# EAGLE board PiedPiper_Camera_PCB_v51 (EAGLE 9.7.0)
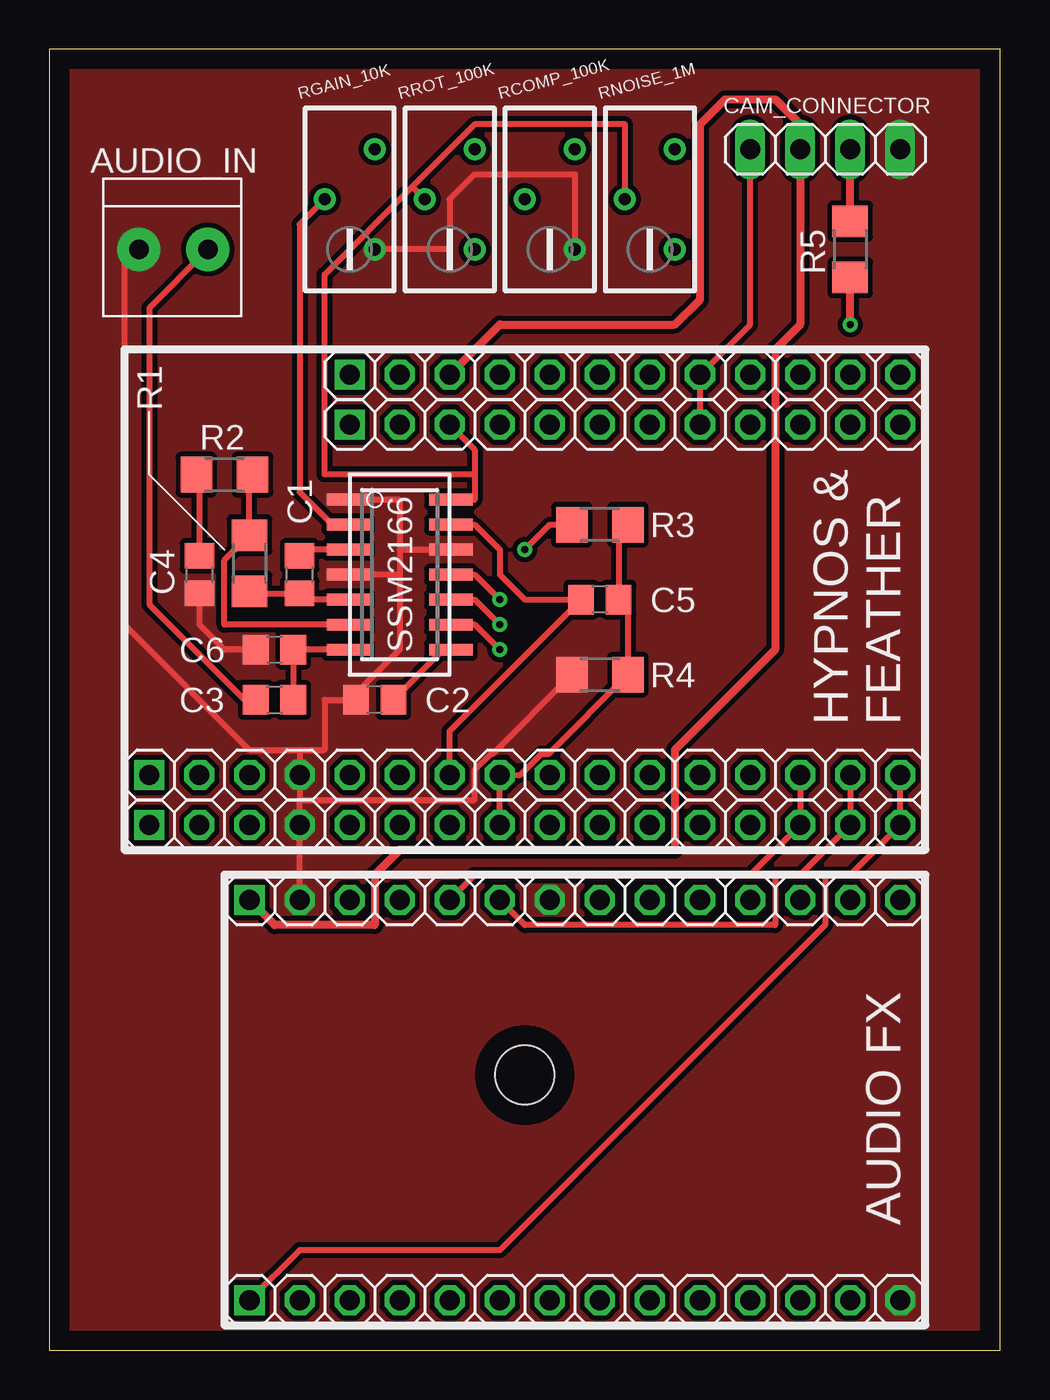
[diagram p0: board, top side]
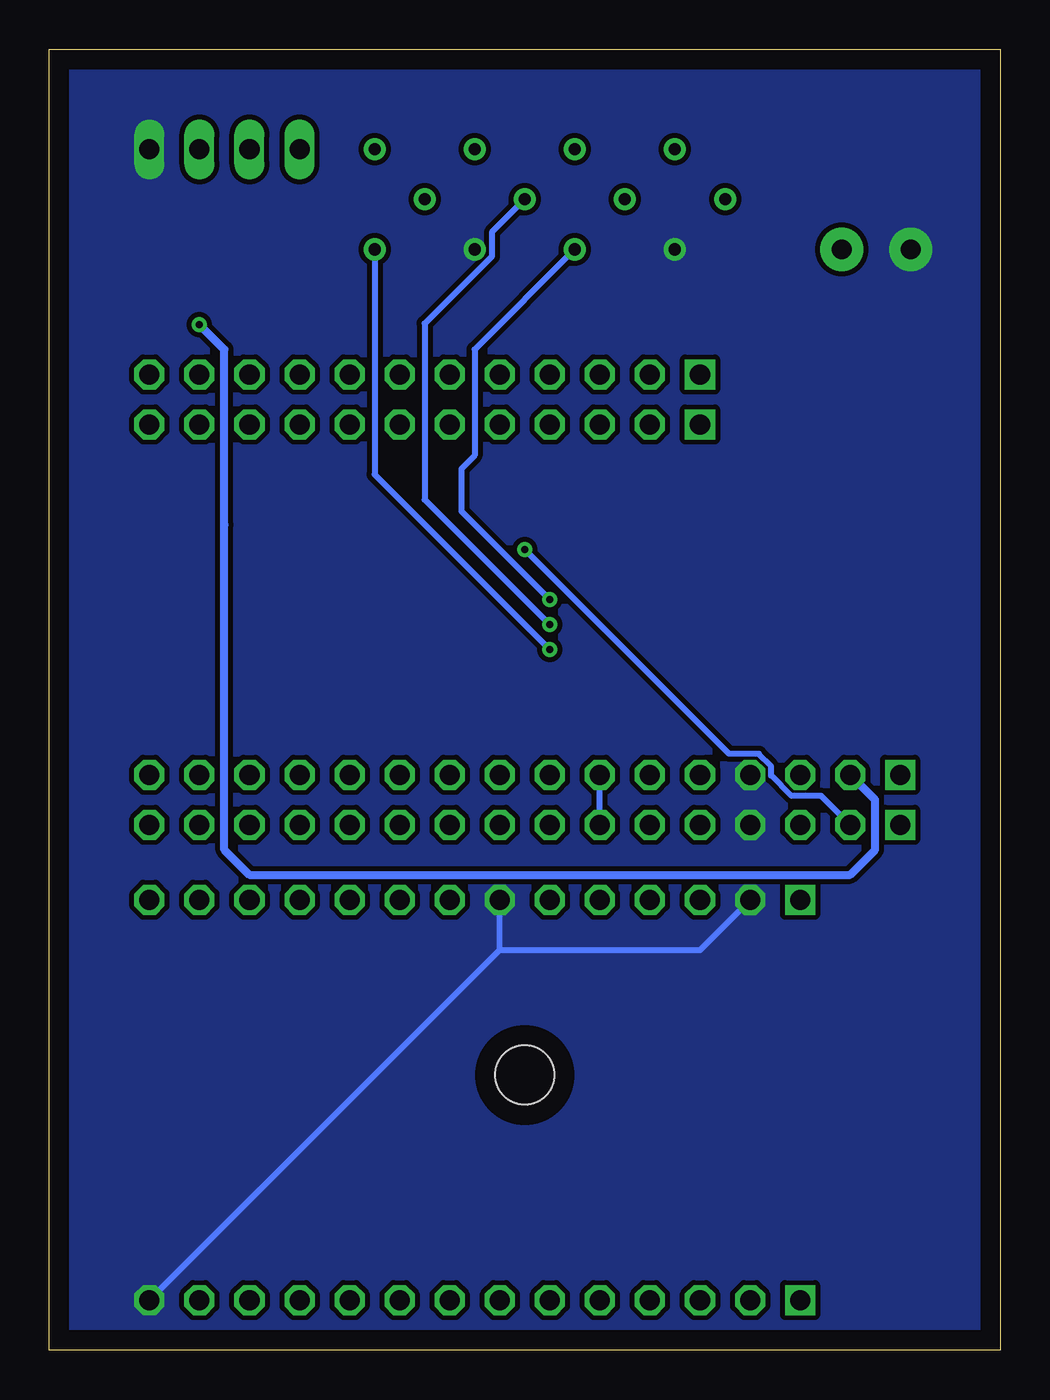
[diagram p1: board, bottom side, seen from below]

Size 48.26 x 66.04 mm. Coordinates in mm from the lower left corner, seen from the top.
Outline: 0,0 48.26,0 48.26,66.04 0,66.04 0,0
Copper layers (1*16): Top 0.035mm / dielectric 1.5mm / Bottom 0.035mm
Design rules "default": minimum track width 6mil, minimum drill 0.35mm, track to track 6mil, track to pad 6mil, pad to pad 6mil, via to via 6mil, smd to smd 6mil, copper to edge 40mil, drill to drill 6mil, minimum pad ring 10mil, minimum via ring 8mil, stop-mask expansion 4mil, vias tented up to drill 0mil, thermal gap 10mil
Holes 3 mm at 24.13,13.97

## Footprints (pad centres in the part's own frame; a part is rotated, then mirrored left to right if it is on the bottom)
1X14-S = drill 1.016 square: 1 -16.51,0 | drill 1.016 octagon: 2 -13.97,0; 3 -11.43,0; 4 -8.89,0; 5 -6.35,0; 6 -3.81,0; 7 -1.27,0; 8 1.27,0; 9 3.81,0; 10 6.35,0; 11 8.89,0; 12 11.43,0; 13 13.97,0; 14 16.51,0
1X2-3.5MM = drill 1 pad 2.184: 1 1.8,0; 2 -1.7,0
C0805 = smd 1.3 x 1.5: 1 -0.95,0; 2 0.95,0
1X04 = drill 1.016 long: 1 -3.81,0; 2 -1.27,0; 3 1.27,0; 4 3.81,0
1X16-S = drill 1.016 square: 1 -19.05,0 | drill 1.016 octagon: 2 -16.51,0; 3 -13.97,0; 4 -11.43,0; 5 -8.89,0; 6 -6.35,0; 7 -3.81,0; 8 -1.27,0; 9 1.27,0; 10 3.81,0; 11 6.35,0; 12 8.89,0; 13 11.43,0; 14 13.97,0; 15 16.51,0; 16 19.05,0
1X12-S = drill 1.016 square: 1 -13.97,0 | drill 1.016 octagon: 2 -11.43,0; 3 -8.89,0; 4 -6.35,0; 5 -3.81,0; 6 -1.27,0; 7 1.27,0; 8 3.81,0; 9 6.35,0; 10 8.89,0; 11 11.43,0; 12 13.97,0
R1206 = smd 1.6 x 1.803: 1 -1.422,0; 2 1.422,0
RTRIM3296Y = drill 0.61: 1 1.27,-2.54; 2 -1.27,0; 3 1.27,2.54
SO14 = smd 0.6 x 2.2: 1 -3.81,-2.6; 2 -2.54,-2.6; 3 -1.27,-2.6; 4 0,-2.6; 5 1.27,-2.6; 6 2.54,-2.6; 7 3.81,-2.6; 8 3.81,2.6; 9 2.54,2.6; 10 1.27,2.6; 11 0,2.6; 12 -1.27,2.6; 13 -2.54,2.6; 14 -3.81,2.6

## Placement (x,y rotation side)
AUDFX_L  [1X14-S]  26.67,2.54 0 top
AUDFX_R  [1X14-S]  26.67,22.86 0 top
AUDIO_IN  1X2-3.5MM  [1X2-3.5MM]  6.35,55.88 180 top
C1  10u  [C0805]  12.7,39.37 90 top
C2  2.2u  [C0805]  16.51,33.02 180 top
C3  0.1u  [C0805]  11.43,33.02 0 top
C4  1u  [C0805]  7.62,39.37 270 top
C5  [C0805]  27.94,38.1 180 top
C6  1n  [C0805]  11.43,35.56 0 top
CAM_CONNECTOR  [1X04]  39.37,60.96 0 top
FEATHER_LONG  [1X16-S]  24.13,26.67 0 top
FEATHER_SHORT  [1X12-S]  29.21,46.99 0 top
HYPNOS_LONG  [1X16-S]  24.13,29.21 0 top
HYPNOS_SHORT  [1X12-S]  29.21,49.53 0 top
R1  10k  [R1206]  10.16,39.95 90 top
R2  10k  [R1206]  8.89,44.45 180 top
R3  100k  [R1206]  27.94,41.91 0 top
R4  100k  [R1206]  27.94,34.29 180 top
R5  [R1206]  40.64,55.88 90 top
RCOMP_100K  [RTRIM3296Y]  25.4,58.42 0 top
RGAIN_10K  [RTRIM3296Y]  15.24,58.42 0 top
RNOISE_1M  [RTRIM3296Y]  30.48,58.42 0 top
RROT_100K  [RTRIM3296Y]  20.32,58.42 0 top
SSM2166  SSM2166S  [SO14]  17.78,39.37 270 top

## Library data of the parts
AUDFX_L AUDFX_R FEATHER_LONG FEATHER_SHORT HYPNOS_LONG HYPNOS_SHORT = pinhead-2
AUDIO_IN = adafruit
C1-C6 = rcl; SPICEPREFIX: C
CAM_CONNECTOR = pinhead
R1-R5 = rcl; SPICEPREFIX: R
RCOMP_100K RGAIN_10K RNOISE_1M RROT_100K = rcl; SPICEMODEL: X; SPICEPREFIXL: POT
SSM2166 = SSM2166; AVAILABILITY: Unavailable; DESCRIPTION: ADI MICROPHONE PREAMP W/VAR COMPRESS; MF: Analog Devices; MP: SSM2166; PACKAGE: None; PRICE: None; SPICEPREFIX: X

## Nets
3VR: HYPNOS_LONG.2 R5.1
5VR: AUDFX_R.1 CAM_CONNECTOR.2 HYPNOS_SHORT.3
+IN: C3.2 C6.2 SSM2166.7
A2: C5.2 FEATHER_LONG.7 HYPNOS_LONG.7 SSM2166.13
A3: C5.1 FEATHER_LONG.8 HYPNOS_LONG.8 R3.2 R4.1
AUDFX_RESET: AUDFX_L.1 FEATHER_LONG.16 HYPNOS_LONG.16
BUFF: C1.1 R1.1 SSM2166.5
CAP: C2.1 SSM2166.8
COMP: RCOMP_100K.2 SSM2166.10
FEATHER_3V: FEATHER_LONG.2 R3.1
FEATHER_RX/AUDFX_TX: AUDFX_R.5 FEATHER_LONG.14 HYPNOS_LONG.14
FEATHER_TX/AUDFX_RX: AUDFX_R.6 FEATHER_LONG.15 HYPNOS_LONG.15
GAIN: RGAIN_10K.2 SSM2166.2
GND: AUDFX_L.14 AUDFX_R.2 AUDFX_R.7 AUDIO_IN.1 C2.2 C4.2 C6.1 CAM_CONNECTOR.4 FEATHER_LONG.4 HYPNOS_LONG.4 R4.2 RCOMP_100K.1 RGAIN_10K.1 SSM2166.1 SSM2166.4 SSM2166.12
IMG_CONT: CAM_CONNECTOR.1 FEATHER_SHORT.8 HYPNOS_SHORT.8
IN-: R1.2 R2.1 SSM2166.6
N$1: CAM_CONNECTOR.3 R5.2
N$2: AUDIO_IN.2 C3.1
N$15: C4.1 R2.2
NOIS_GATE_SET: RNOISE_1M.1 SSM2166.9
ROTATION_POINT_SET: RROT_100K.1 SSM2166.11
USB_5V: FEATHER_SHORT.3 RNOISE_1M.2 RROT_100K.2 SSM2166.14
VCA: C1.2 SSM2166.3

## Tracks (layer width: path | path; a pad name or v marks a point on that pad's centre or on a via)
3VR  (via drill 0.35)
  Top 0.406: v40.64,52.07 R5.1
  Bottom 0.406: HYPNOS_LONG.2 6.35,27.94 6.35,25.4 7.62,24.13 38.1,24.13 39.37,25.4 39.37,41.91 | 39.37,41.91 39.37,50.8 v40.64,52.07 | 39.37,41.91
5VR
  Top 0.406: HYPNOS_SHORT.3 22.86,52.07 31.75,52.07 33.02,53.34 33.02,62.23 34.29,63.5 36.83,63.5 38.1,62.23 CAM_CONNECTOR.2 38.1,52.07 36.83,50.8 36.83,35.56 31.75,30.48 31.75,25.4 17.78,25.4 16.51,24.13 16.51,21.59 11.43,21.59 AUDFX_R.1
+IN
  Top 0.305: SSM2166.7 C6.2 C3.2
A2
  Top 0.305: SSM2166.13 21.59,41.91 22.86,40.64 22.86,39.37 24.13,38.1 C5.2 20.32,31.43 HYPNOS_LONG.7
  Bottom 0.305: FEATHER_LONG.7 HYPNOS_LONG.7
A3
  Top 0.305: FEATHER_LONG.8 HYPNOS_LONG.8 23.89,29.21 24.96,30.28 25.35,30.28 R4.1 29.36,37.63 C5.1 28.89,41.44 R3.2
AUDFX_RESET
  Top 0.305: HYPNOS_LONG.16 FEATHER_LONG.16 40.64,24.13 39.37,24.13 39.37,21.59 22.86,5.08 12.7,5.08 AUDFX_L.1
BUFF
  Top 0.305: R1.1 10.86,38.42 C1.1 12.7,38.1 SSM2166.5
CAP
  Top 0.305: SSM2166.8 20,35.56 C2.1
COMP  (via drill 0.35)
  Top 0.305: v22.86,36.83 21.59,38.1 SSM2166.10
  Bottom 0.305: RCOMP_100K.2 25.81,56.74 25.81,55.52 29.21,52.12 29.21,43.18 v22.86,36.83
FEATHER_3V  (via drill 0.35)
  Top 0.305: v24.13,40.64 25.4,41.91 R3.1
  Bottom 0.305: FEATHER_LONG.2 9.09,28.14 10.6,28.14 11.63,29.18 11.63,29.65 12.26,30.28 13.77,30.28 v24.13,40.64
FEATHER_RX/AUDFX_TX
  Top 0.305: HYPNOS_LONG.14 FEATHER_LONG.14 35.56,24.13 21.59,24.13 AUDFX_R.5
FEATHER_TX/AUDFX_RX
  Top 0.305: HYPNOS_LONG.15 FEATHER_LONG.15 38.1,24.13 36.83,24.13 36.83,21.59 24.13,21.59 AUDFX_R.6
GAIN
  Top 0.305: RGAIN_10K.2 12.7,57.15 12.7,43.57 14.36,41.91 SSM2166.2
GND
  Top 0.305: SSM2166.1 17.78,43.18 17.78,40.64 | 17.78,40.64 SSM2166.12 | 17.78,40.64 17.78,39.37 | 17.78,39.37 SSM2166.4 | C6.1 8.89,35.56 7.62,36.83 C4.2 | AUDIO_IN.1 3.81,55.14 3.81,36.83 10.16,30.48 12.7,30.48 | 12.7,30.48 HYPNOS_LONG.4 12.7,27.94 | 12.7,27.94 FEATHER_LONG.4 AUDFX_R.2 | 12.7,30.48 13.97,30.48 13.97,33.02 C2.2 15.56,33.34 17.78,35.56 17.78,39.37 | RCOMP_100K.1 26.67,59.69 21.59,59.69 20.32,58.42 20.32,55.88 RGAIN_10K.1 | 12.7,27.94 21.59,27.94 21.59,29.45 22.42,30.28 22.5,30.28 R4.2
  Bottom 0.305: AUDFX_L.14 25.4,20.32 | 25.4,20.32 AUDFX_R.7 | 25.4,20.32 15.24,20.32 AUDFX_R.2
  pour Top (isolate 0.254, no thermals): 0.15,0.15 48.11,0.15 48.11,65.89 0.15,65.89
  pour Bottom (isolate 0.254, no thermals): 0.2,0.2 48.06,0.2 48.06,65.84 0.2,65.84
IMG_CONT
  Top 0.305: FEATHER_SHORT.8 HYPNOS_SHORT.8 35.56,52.07 CAM_CONNECTOR.1
IN-
  Top 0.305: R2.1 10.16,44.3 R1.2 8.89,40.11 8.89,36.83 SSM2166.6
N$1
  Top 0.406: R5.2 CAM_CONNECTOR.3
N$2
  Top 0.305: AUDIO_IN.2 5.08,52.91 5.08,37.86 9.92,33.02 C3.1
N$15
  Top 0.305: R2.2 7.62,44.3 C4.1
NOIS_GATE_SET  (via drill 0.35)
  Top 0.305: SSM2166.9 21.59,36.83 v22.86,35.56
  Bottom 0.305: RNOISE_1M.1 31.75,44.45 v22.86,35.56
ROTATION_POINT_SET  (via drill 0.35)
  Top 0.305: v22.86,38.1 21.59,39.37 SSM2166.11
  Bottom 0.305: RROT_100K.1 26.67,50.8 26.67,45.42 27.35,44.73 27.35,42.59 v22.86,38.1
USB_5V
  Top 0.305: RNOISE_1M.2 29.21,62.23 21.59,62.23 18.41,59.05 | FEATHER_SHORT.3 21.59,45.72 21.59,44.45 | 21.59,44.45 21.59,43.18 SSM2166.14 | 21.59,44.45 13.97,44.45 13.97,54.61 18.41,59.05 | 18.41,59.05 RROT_100K.2
VCA
  Top 0.305: SSM2166.3 12.7,40.64 C1.2

## Text on the board
tNames: HYPNOS & / FEATHER | AUDIO FX